# Altium PCB PCB1.PcbDoc
Units mil, origin at the board's own origin, x right, y up, seen from the top; angles counter-clockwise.
Board outline 4265 x 1410 mil, 2 copper layers (Top Layer, Bottom Layer); 24 components, 19 nets, 98 pads, 691 vias.
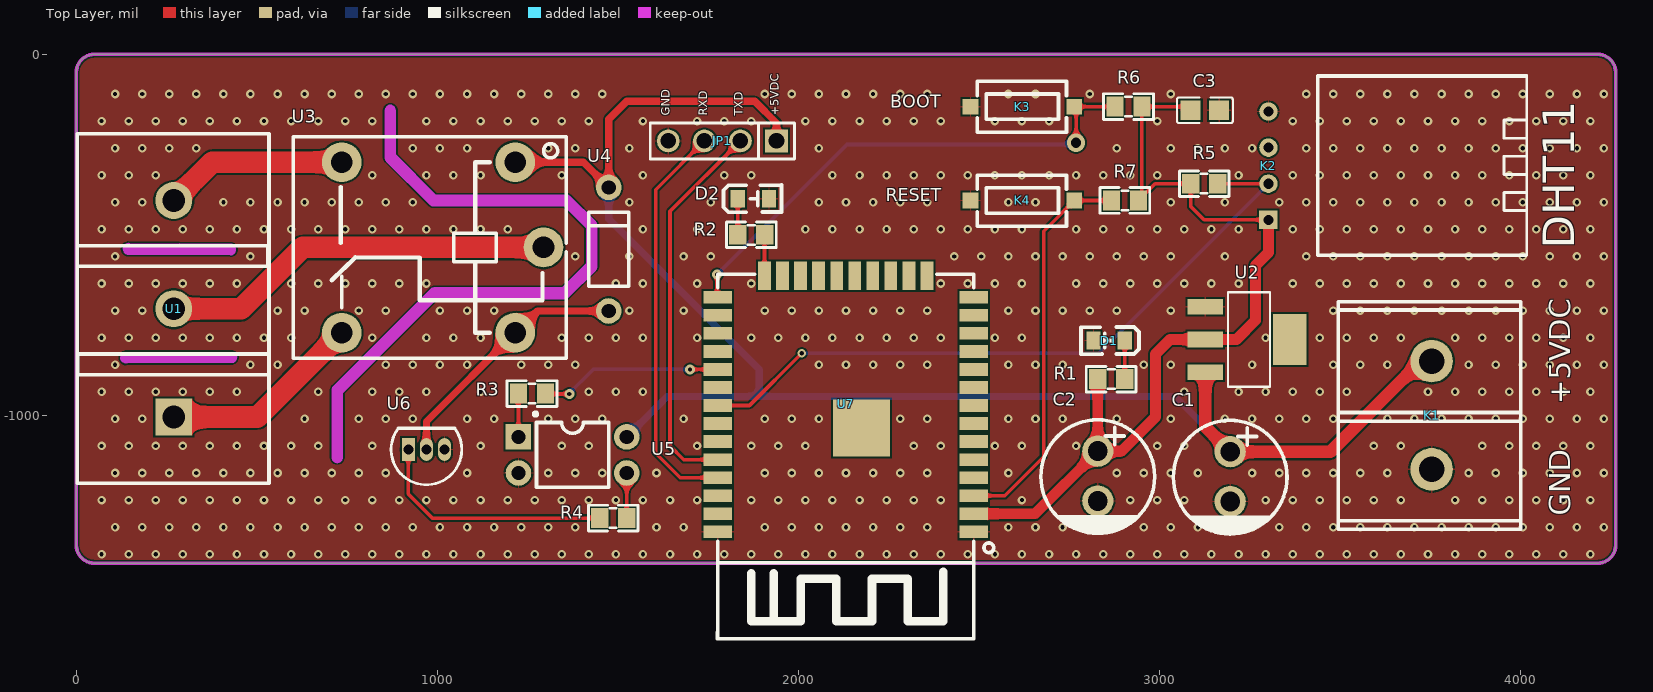
[diagram p0: Top Layer view]
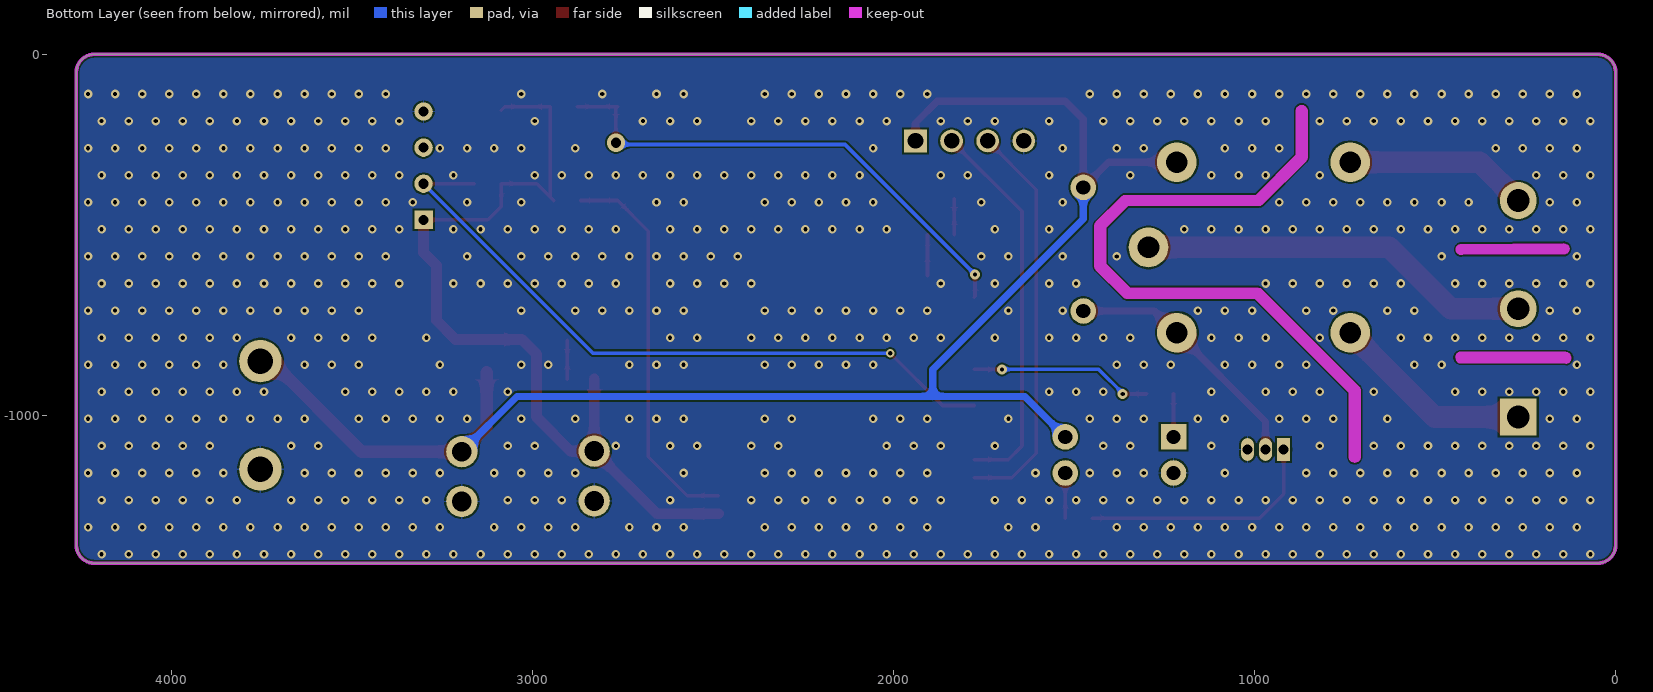
[diagram p1: Bottom Layer view, seen from below]
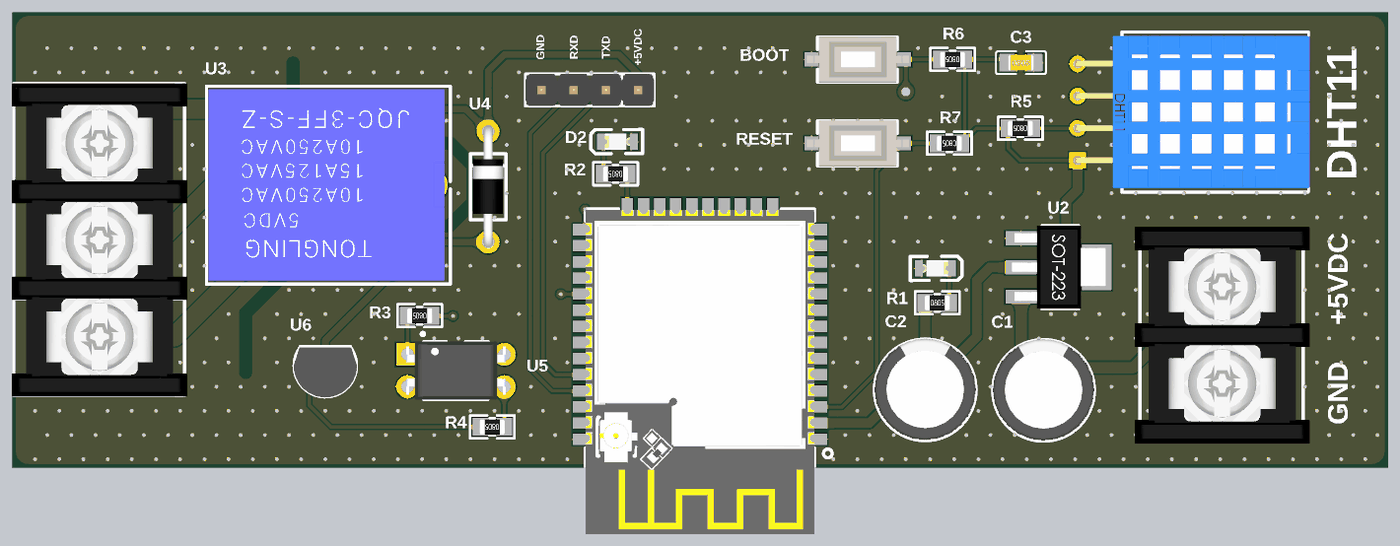
[diagram p2: 3D render of the assembled board from above, using the file's embedded part models]

## Layer stack, top to bottom
Top Solder: solder mask 0.4, Solder Resist, Dk 3.5
Top Layer: signal copper 1.4
Dielectric 1: dielectric 12.6, FR-4, Dk 4.8
Bottom Layer: signal copper 1.4
Bottom Solder: solder mask 0.4, Solder Resist, Dk 3.5

## Board outline
0,-1360 ccw(c50,-1360) 50,-1410 4215,-1410 ccw(c4215,-1360) 4265,-1360 4265,-50 ccw(c4215,-50) 4215,0 50,0 ccw(c50,-50) 0,-50
cut-out: 738.01,-1116 738.01,-937.22 998.22,-677.01 1353,-677.01 ccw(c1353,-662) 1363.63,-672.6 1363.62,-672.62 1438.62,-597.62 1438.6,-597.63 ccw(c1428,-587) 1443.01,-587 1443.01,-475 ccw(c1428,-475) 1438.6,-464.37 1438.62,-464.38 1368.62,-394.38 1368.63,-394.4 ccw(c1358,-405) 1358,-389.99 996.22,-389.99 885.01,-278.78 885.01,-156 ccw(c870,-156) 854.99,-156 854.99,-285 ccw(c870,-285) 859.4,-295.63 859.38,-295.62 979.38,-415.62 979.37,-415.6 ccw(c990,-405) 990,-420.01 1351.78,-420.01 1412.99,-481.22 1412.99,-580.78 1346.78,-646.99 992,-646.99 ccw(c992,-662) 981.37,-651.4 981.38,-651.38 712.38,-920.38 712.4,-920.37 ccw(c723,-931) 707.99,-931 707.99,-1116 ccw(c723,-1116)
cut-out: 143.89,-554.01 426.89,-556.01 ccw(c427,-541) 442.01,-541 ccw(c427,-541) 427.11,-525.99 144.11,-523.99 ccw(c144,-539)
cut-out: 138.05,-856.01 cw(c138,-841) 137.95,-825.99 428.95,-824.99 cw(c429,-840) 444.01,-840 cw(c429,-840) 429.05,-855.01

## Design rules (kind name [scope] priority, off if disabled: settings)
BoardOutlineClearance [All] p1: gap=0 ignorepadtopadclearanceinfootprint=FALSE
Clearance [All] p1: gap=5 ignorepadtopadclearanceinfootprint=FALSE except(9.84: Arc-Hole Track-Hole SMDPad-Hole THPad-Hole Via-Hole Fill-Hole Poly-Hole Region-Hole Text-Hole)
ComponentClearance [All] p1: gap=5 collisioncheckmode=3 verticalgap=5 showdistances=TRUE
DiffPairsRouting [All] p1: maxlimit=10 minlimit=5 mostfreqgap=5 toplayer_minwidth=5 toplayer_maxwidth=1000 toplayer_prefwidth=5 bottomlayer_minwidth=5 bottomlayer_maxwidth=1000 bottomlayer_prefwidth=5 maxuncoupledlength=500
Height [All] p1: minheight=0 maxheight=71497.94 prefheight=500
HoleSize [All] p1: absolutevalues=TRUE maxlimit=248.03 minlimit=11.81 maxpercent=80.000 minpercent=20.000
HoleToHoleClearance [All] p1: gap=9.84 allowstackedmicrovias=FALSE
MinimumAnnularRing [All] p1: minimumring=3
MinimumSolderMaskSliver [All] p1: minsoldermaskwidth=0
PlaneClearance [All] p1: clearance=5
PlaneConnect PlaneConnectPowerPads [InPadClass('PowerPads')] p1: planeconnectstyle=Direct reliefexpansion=20 reliefentries=4 reliefconductorwidth=10 reliefairgap=10
PlaneConnect [All] p2: pad.planeconnectstyle=Relief pad.reliefexpansion=11.81 pad.reliefentries=4 pad.reliefconductorwidth=5 pad.reliefairgap=5 via.planeconnectstyle=Direct via.reliefexpansion=11.81 via.reliefentries=4 via.reliefconductorwidth=5 via.reliefairgap=5
PolygonConnect PolygonConnectPowerPads [All vs (InPadClass('PowerPads'))] p1: connectstyle=Direct reliefconductorwidth=10 reliefentries=4 polygonreliefangle="90 Angle" airgapwidth=10
PolygonConnect [All] p2: thpad.connectstyle=Relief thpad.reliefconductorwidth=5 thpad.reliefentries=4 thpad.polygonreliefangle="90 Angle" thpad.airgapwidth=5 smdpad.connectstyle=Relief smdpad.reliefconductorwidth=5 smdpad.reliefentries=4 smdpad.polygonreliefangle="90 Angle" smdpad.airgapwidth=5 via.connectstyle=Direct via.reliefconductorwidth=5 via.reliefentries=4 via.polygonreliefangle="90 Angle" via.airgapwidth=5
RoutingVias [All] p1: holewidth=11.81 width=23.62 viastyle="Through Hole" minholewidth=11.81 minwidth=23.62 maxholewidth=23.62 maxwidth=259.84
SilkToSilkClearance [All] p1: silktosilkclearance=0
SilkToSolderMaskClearance [IsPad] p1: minsilkscreentomaskgap=0 clearancetoexposedcopper=TRUE
SolderMaskExpansion [All] p1: expansion=2.95 istentingtop=FALSE
Width [All] p1: maxlimit=1000 minlimit=5 preferedwidth=5 minimp=50.000000 maximp=50.000000 favimp=50.000000
20 further rules are at their usual default settings.

## Components (designator, comment, footprint, x,y, rotation, side; value= is the part's Value field where it differs from the comment)
C1 "100uF" C_TH_8x11.5 3196.97,-1170 r270 top
C2 "100uF" C_TH_8x11.5 2830,-1168.48 r270 top
C3 "100nF" C0805 3126.97,-155 r0 top
D1 "RED" LED0805 2861.5,-793 r180 top
D2 "RED" LED0805 1875.91,-400 r0 top
JP1 "JP 1x4 2.54" "JP 1X4 DT" 1940,-240 r180 top
K1 "DBT10-7.62-2P-GN-P" DBT10-7.62-2P-GN-P 3755,-1000 r270 top
K2 "DHT11" DHT11 3302.85,-308.54 r90 top
K3 "HX 3x6x2.5A-2.5N" "HX 3x6x2.5A-2.5N" 2621.3,-145 r180 top
K4 "HX 3x6x2.5A-2.5N" "HX 3x6x2.5A-2.5N" 2621.3,-405 r180 top
R1 "1kΩ" R0805 2867.4,-900 r0 top
R2 "1kΩ" R0805 1870,-500 r180 top
R3 "1kΩ" R0805 1262.4,-940 r180 top
R4 "1kΩ" R0805 1487.6,-1285 r180 top
R5 "1kΩ" R0805 3125,-358.54 r180 top
R6 "1kΩ" R0805 2915,-145 r180 top
R7 "1kΩ" R0805 2905,-405 r180 top
U1 "DBT50G-7.62-3P-BK-P" DBT50G-7.62-3P-BK-P 270,-705 r90 top
U2 "LM1117S-3.3" AMS1117-3.3 3245,-790 r180 top
U3 "SRD-05VDC-SL-C" SRD-05VDC-SL-C 1015,-535 r180 top
U4 "1N4007G" 1N4007G 1475,-540 r270 top
U5 "PC817X3NSZWC" PC817X3NSZWC 1375,-1110 r270 top
U6 "2SC2383-Y" 2SC2383-Y 970,-1095 r180 top
U7 "ESP32-S32Mb" ESP32-S32Mb 2131.69,-968.51 r180 top

## Footprints (in the part's own frame and the unit in brackets; to place one, negate y for a bottom-side part, rotate by r counter-clockwise, add the part's x,y. Pads: shape width x height; smd on the part's side, far side on the other; paste and mask are expansions set on the pad)
1N4007G [mm] "30A 1kV 930mV@1A 1A DO-41 Single Diodes RoHS"
  round 1.8 hole 1 paste-2539.97 mask+0.051: 1(-4.35,0) 2(4.35,0)
  silkscreen extent -2.6,-1.4 2.6,1.4, body extent -4.82,-1.2 4.77,1.2, height 2.34
2SC2383-Y [mm] "900mW 160V 1A NPN TO-92LM Single Bipolar Transistors RoHS"
  rect 0.9x1.6 hole 0.7 paste-2539.97 mask+0.051: 1(1.27,0)
  oval 0.9x1.6 hole 0.7 paste-2539.97 mask+0.051: 2(0,0) 3(-1.27,0)
  silkscreen extent -2.48,-1.5 2.48,2.48, body extent -2.79,-1.45 2.79,2.5, height 8
AMS1117-3.3 [mm]
  rect 2.5x1.1 smd paste+0 mask+0.051: 1(2.97,-2.3) 2(2.97,0) 3(2.97,2.3)
  rect 2.34x3.6 smd paste+0 mask+0.051: 4(-2.97,0)
  silkscreen extent -1.57,-3.33 1.37,3.33, body extent -3.66,-3.28 3.71,3.22, height 1.82
C0805 [mm]
  rect 1.41x1.35 smd paste-100 mask+0.051: 1(-1,0) 2(1,0)
  silkscreen extent -1.96,-0.9 1.96,0.9, body extent -1,-0.63 1,0.63, height 0.6
C_TH_8x11.5 [mm]
  round 2.2 hole 1.4 paste-2539.97 mask+0.051: 1(-1.75,0) 2(1.75,0)
  silkscreen extent -3.96,-4 4.04,4, body extent -4,-3.99 4,3.99, height 11.5
DBT10-7.62-2P-GN-P [mm] "1x2P Side Mount 2-Side 7.62mm 1 2 24A -40?~+105? Green 14~22 Straight Pin Through Hole,P=7.62mm Barrier Blocks RoHS"
  round 3 hole 1.8 paste-2539.97 mask+0.051: 1(-3.81,0) 2(3.81,0)
  silkscreen extent -7.97,-6.58 8.03,6.27, body extent -8.54,-7 8.54,6.8, height 14.8
DBT50G-7.62-3P-BK-P [mm] "1x3P Side Mount With Cover Plate 7.62mm 1 3 -40?~+105? 20A Black 12~22 Straight Pin Through Hole,P=7.62mm Barrier Blocks RoHS"
  rect 2.6x2.6 hole 1.6 paste-2539.97 mask+0.051: 1(-7.62,0)
  round 2.6 hole 1.6 paste-2539.97 mask+0.051: 2(0,0) 3(7.62,0)
  silkscreen extent -12.27,-6.71 12.32,6.78, body extent -12.35,-6.9 12.36,6.9, height 14.8
DHT11 [mil] "±5%RH -20?~+60? 5%RH~95%RH SIP-4 Humidity, Moisture Sensors RoHS"
  rect 51x51 hole 28 paste-99999 mask+2: 1(-150,0)
  round 51 hole 28 paste-99999 mask+2: 2(-50,0) 3(50,0) 4(150,0)
  silkscreen extent -248,-716 249,-137, body extent -235,-719 237,9, height 219
ESP32-S32Mb [mm] "2.4GHz ESP32 Chip On-board PCB Antenna -90dBm RF Transceiver Modules and Modems RoHS"
  rect 2x0.9 smd paste+0 mask+0.05: 1(-9,9.005) 2(-9,7.735) 3(-9,6.465) 4(-9,5.195) 5(-9,3.925) 6(-9,2.655) 7(-9,1.385) 8(-9,0.115) 9(-9,-1.155) 10(-9,-2.425) 11(-9,-3.695) 12(-9,-4.965) 13(-9,-6.235) 14(-9,-7.505) 25(9,-7.505) 26(9,-6.235) 27(9,-4.965) 28(9,-3.695) 29(9,-2.425) 30(9,-1.155) 31(9,0.115) 32(9,1.385) 33(9,2.655) 34(9,3.925) 35(9,5.195) 36(9,6.465) 37(9,7.735) 38(9,9.005)
  rect 0.9x2 smd paste+0 mask+0.05: 15(-5.715,-9.005) 16(-4.445,-9.005) 17(-3.175,-9.005) 18(-1.905,-9.005) 19(-0.635,-9.005) 20(0.635,-9.005) 21(1.905,-9.005) 22(3.175,-9.005) 23(4.445,-9.005) 24(5.715,-9.005)
  rect 4x4 smd paste+0 mask+0.05: 39(-1.1,1.689)
  silkscreen extent -10.41,-9.13 9.02,16.54, body extent -9,-9.07 9,16.53, height 3.2
"HX 3x6x2.5A-2.5N" [mm] "Without Bracket 6mm 12V 3.6mm Square Button No SPST 50mA SMD,6x3mm Tactile Switches RoHS"
  rect 1.1x1.1 smd paste+0 mask+0.051: 1(-3.65,0) 2(3.65,0)
  silkscreen extent -3.1,-1.78 3.18,1.8, body extent -4.03,-1.83 4.03,1.83, height 2.51
"JP 1X4 DT" [mm] "4 pins, 1 row, straight, gold plating"
  rect 1.6x1.6 hole 1.1: 1(0,0)
  round 1.6 hole 1.1: 2(2.54,0) 3(5.08,0) 4(7.62,0)
  silkscreen extent -1.27,-1.27 8.89,1.27, body extent -1.27,-1.27 8.89,1.27, height 8.54
LED0805 [mm]
  rect 1x1.25 smd paste+0 mask+0.051: 1(-1.1,0) 2(1.1,0)
  silkscreen extent -2.1,-0.95 1.98,0.96, body extent -1,-0.63 1,0.63, height 0.7
PC817X3NSZWC [mm] "50mA 100mV@20mA,1mA 80V 6V DC DIP-4 Transistor, Photovoltaic Output Optoisolators RoHS"
  rect 1.8x1.8 hole 1 paste-2539.97 mask+0.051: 1(-1.27,-3.81)
  round 1.8 hole 1 paste-2539.97 mask+0.051: 2(1.27,-3.81) 3(1.27,3.81) 4(-1.27,3.81)
  silkscreen extent -3,-2.73 2.29,2.54, body extent -2.3,-3.94 2.3,3.94, height 4.55
R0805 [mm]
  rect 1.2x1.4 smd: 1(-0.95,0) 2(0.95,0)
  silkscreen extent -1.75,-0.9 1.75,0.9, body extent -1,-0.6 1,0.6, height 0.4
SRD-05VDC-SL-C [mil] "250V@AC 5V 15A Through Hole,19.2x15.6mm Power Relays RoHS"
  round 110 hole 60 paste-99999 mask+2: 1(-200.79,-236.22) 2(279.53,-236.2) 3(279.53,236.2) 4(-200.79,236.22) 5(-279.53,0)
  silkscreen extent -342,-307 413,307, body extent -325,-298 407,296, height 593

## Part data
C1 C2: library part C_100uF_8x11.5_TH, "3.5mm 100uF 50V ±20% Through Hole,D8xL11.5mm Aluminum Electrolytic Capacitors RoHS", LCSC Part #=C88728, Manufacturer=Rubycon, Mfr. Part #=50YXF100MEFC8X11.5, Package="Through Hole,D5xL11mm", Tolerance=±20%, Voltage Rating=50V, Capacitance=100uF, Key Attributes="CAP ALUM 100uF ±20% 50V TH", Link=https://www.lcsc.com/product-detail/C88728.html?s_z=n_capital%2520100u%2520hole, Pin Spacing=2mm
C3: library part C0805_100nF_±1%, "50V 10pF NP0 ±1% 0402 Multilayer Ceramic Capacitors MLCC - SMD/SMT ROHS", LCSC Part #=C513681, Manufacturer=YAGEO, Mfr. Part #=CC0402FRNPO9BN100, Package=0805, Tolerance=±1%, Voltage Rating=50V, Capacitance=100nF, Link=https://www.lcsc.com/product-detail/C513681.html?s_z=n_capital%2520yageo%252010pF%25200402
D1 D2: library part D0805_RED, "25mcd~40mcd Water Clear -40℃~+85℃ 624nm Red 120° 60mW 0402 LED Indication - Discrete ROHS", LCSC Part #=C965793, Manufacturer=XINGLIGHT, Mfr. Part #=XL-1005UGC, Package=0805, Power(Watts)=60mW, Voltage - Forward(Vf)=3V, Illumination Color=RED, Link=https://www.lcsc.com/product-detail/C136765.html?s_z=n_LED%25200402%2520RED
JP1: library part "JP 1x4 2.54 Cai Thang", "Cắm", Chung_Loai=Cắm, Don_Vi=Con, Ma_Hang=MH004006, Ten_Linh_Kien="Jump Đơn Cái 2.54MM 1x20P Thẳng"
K1: "1x2P Side Mount 2-Side 7.62mm 1 2 24A -40℃~+105℃ Green 14~22 Straight Pin Through Hole,P=7.62mm Barrier Blocks RoHS", LCSC Part #=C395930, Manufacturer=DORABO, Package="Through Hole,P=7.62mm", Key Attributes="TERM BLK BARRIER 2CIRCUIT 7.62mm", Link=https://www.lcsc.com/product-detail/C395930.html?s_z=n_BARRIER%2520STRIP, Mfr. Part #=DBT10-7.62-2P-GN-P
K2: "±5%RH -20℃~+60℃ 5%RH~95%RH SIP-4 Humidity, Moisture Sensors RoHS", LCSC Part #=C117051, Manufacturer=Aosong, Package=SIP-4, Link=https://www.lcsc.com/product-detail/C117051.html?s_z=n_dht11, Mfr. Part #=DHT11
K3 K4: "Without Bracket 6mm 12V 3.6mm Square Button No SPST 50mA SMD,6x3mm Tactile Switches RoHS", LCSC Part #=C36498960, Manufacturer=hanxia, Package=SMD,6x3mm, Key Attributes="SWITCH TACTILE SPST 250gf SMD", Link=https://www.lcsc.com/product-detail/C36498960.html?s_z=n_button, Mfr. Part #="HX 3x6x2.5A-2.5N"
R1 R2 R3 R4 R5 R6 R7: library part R0805_1kΩ_±1%, "62.5mW Thick Film Resistor 50V ±1% ±200ppm/℃ 10Ω 0402 Chip Resistor - Surface Mount ROHS", LCSC Part #=C138066, Manufacturer=YAGEO, Mfr. Part #=RC0805FR-0710RL, Package=0805, Tolerance=±1%, Link=https://www.lcsc.com/product-detail/C138066.html?s_z=n_resistor%25200402%252010R, Resistance=1kΩ
U1: "1x3P Side Mount With Cover Plate 7.62mm 1 3 -40℃~+105℃ 20A Black 12~22 Straight Pin Through Hole,P=7.62mm Barrier Blocks RoHS", LCSC Part #=C496128, Manufacturer=DORABO, Package="Through Hole,P=7.62mm", Key Attributes="TERM BLK BARRIER 3CIRCUIT 7.62mm", Link=https://www.lcsc.com/product-detail/C496128.html?s_z=n_Barrier%2520blocks, Mfr. Part #=DBT50G-7.62-3P-BK-P
U2: "75dB@(120Hz) 1A Fixed 3.3V Positive 12V SOT-223-3 Voltage Regulators - Linear, Low Drop Out (LDO) Regulators ROHS", LCSC Part #=C126027, Manufacturer=HTC, Output Current=1A, Package=SOT-223-3, Voltage - Supply=12V, Link=https://www.lcsc.com/product-detail/C126027.html?s_z=n_lm1117-33, Mfr. Part #=LM1117S-3.3, Noise=100uV
U3: "250V@AC 5V 15A Through Hole,19.2x15.6mm Power Relays RoHS", LCSC Part #=C35449, Manufacturer="Songle Relay", Package="Through Hole,19.2x15.6mm", Key Attributes="Single group transfer type relay", Link=https://www.lcsc.com/product-detail/C35449.html?s_z=n_relay, Mfr. Part #=SRD-05VDC-SL-C
U4: "30A 1kV 930mV@1A 1A DO-41 Single Diodes RoHS", LCSC Part #=C232439, Manufacturer=onsemi, Package=DO-41, Key Attributes="DIODE STANDARD 1kV 1A DO-41", Link=https://www.lcsc.com/product-detail/C232439.html?s_z=n_1N4007, Mfr. Part #=1N4007G
U5: "50mA 100mV@20mA,1mA 80V 6V DC DIP-4 Transistor, Photovoltaic Output Optoisolators RoHS", LCSC Part #=C39832427, Manufacturer=SHARP, Package=DIP-4, Key Attributes="OPTOISOLATOR 5kV 1CH TRANS DIP-4", Link=https://www.lcsc.com/product-detail/C39832427.html?s_z=n_pc817, Mfr. Part #=PC817X3NSZWC
U6: "900mW 160V 1A NPN TO-92LM Single Bipolar Transistors RoHS", LCSC Part #=C2844058, Manufacturer="BLUE ROCKET", Package=TO-92LM, Key Attributes="TRANS NPN 160V 1A TO-92LM", Link=https://www.lcsc.com/product-detail/C2844058.html?s_z=n_c2383, Mfr. Part #=2SC2383-Y
U7: "2.4GHz ESP32 Chip On-board PCB Antenna -90dBm RF Transceiver Modules and Modems RoHS", LCSC Part #=C2764096, Manufacturer=Ai-Thinker, Package=SMD, Key Attributes="ESP32-S Wi-Fi + BT SoC Module", Link=https://www.lcsc.com/product-detail/C2764096.html?s_z=n_esp32, Mfr. Part #=ESP32-S32Mb

## Via types
v1: diameter 23.62, hole 11.81, Top Layer to Bottom Layer, tented both sides, 687 vias
v2: diameter 27.56, hole 11.81, Top Layer to Bottom Layer, tented both sides, 3 vias
v3: diameter 50, hole 28, Top Layer to Bottom Layer, tented both sides, 1 vias

## Nets (pads, with @x,y where several pads share a name; then routed paths per layer and width w, separated by ;. In a path a pad name is that pad's centre, name@x,y a point inside that pad or via, vN(x,y) a via of type N, cw(c..) or ccw(c..) an arc to the next point about the centre after c; other vN are vias at no path point)
+3.3V: C2.1 C3.1 K2.1 R1.1 R5.2 R6.1 R7.1 U2.2 U7.2 | length 2445.8
  Top Layer w10: R7.1 R7.1@2952.4,-395 ; C3.1 3077.6,-145 R6.1 R7.1@2952.4,-395 ; K2.1 3124.54,-458.54 3087.6,-421.6 R5.2 2988.86,-358.54 R7.1@2952.4,-395
  Top Layer w30: U7.2 2656.54,-1273.04 C2.1 ; R1.1 C2.1 ; K2.1 3302.85,-549.15 3267,-585 3267,-737 3214,-790 U2.2 3030,-790 2990,-830 2990,-1005 2895.42,-1099.58 C2.1
+5V: C1.1 JP1.1 K1.1 U2.3 U3.1 U4.1 U5.4 | length 4482.4
  Top Layer w20: U3.1 1405.04,-298.78 U4.1 1475,-180 1525,-130 1880,-130 1940,-190 JP1.1
  Top Layer w35: U2.3 3128.07,-1032.2 C1.1 3474.65,-1101.1 3725.75,-850 K1.1
  Bottom Layer w20: U4.1 1475,-456 1892,-873 1892,-948 ; U5.4 1637,-948 1892,-948 ; C1.1 3043.87,-948 1892,-948
DATA_DHT11: K2.2 R5.1 U7.31 | length 1920.5
  Top Layer w10: U7.31 1864.97,-973.04 v1(2010,-828) ; R5.1 K2.2
  Bottom Layer w10: v1(2010,-828) 2833.39,-828 K2.2
EN: K4.1 R7.2 U7.3 | length 1086.5
  Top Layer w10: U7.3 2571.97,-1223.04 2680,-1115 2680,-490 K4.1 R7.2
GND: C1.2 C2.2 C3.2 D1.2 D2.2 JP1.4 K1.2 K2.4 K3.2 K4.2 U2.1 U5.2 U6.3 U7.1 U7.38
  other v1: 70,-1385 145,-1385 220,-1385 295,-1385 370,-1385 445,-1385 520,-1385 595,-1385 670,-1385 745,-1385 820,-1385 895,-1385 970,-1385 1045,-1385 1120,-1385 1195,-1385 1270,-1385 1345,-1385 1420,-1385 1495,-1385 1570,-1385 1645,-1385 1720,-1385 1795,-1385 1870,-1385 1945,-1385 2020,-1385 2095,-1385 2170,-1385 2245,-1385 2320,-1385 2395,-1385 2470,-1385 2545,-1385 2620,-1385 2695,-1385 2770,-1385 2845,-1385 2920,-1385 2995,-1385 3070,-1385 3145,-1385 3220,-1385 3295,-1385 3370,-1385 3445,-1385 3520,-1385 3595,-1385 3670,-1385 3745,-1385 3820,-1385 3895,-1385 3970,-1385 4045,-1385 4120,-1385 4195,-1385 107.5,-1310 182.5,-1310 257.5,-1310 332.5,-1310 407.5,-1310 482.5,-1310 557.5,-1310 632.5,-1310 707.5,-1310 782.5,-1310 857.5,-1310 932.5,-1310 1007.5,-1310 1082.5,-1310 1157.5,-1310 1232.5,-1310 1307.5,-1310 1382.5,-1310 1607.5,-1310 1682.5,-1310 1907.5,-1310 1982.5,-1310 2057.5,-1310 2132.5,-1310 2207.5,-1310 2282.5,-1310 2357.5,-1310 2582.5,-1310 2657.5,-1310 2732.5,-1310 2882.5,-1310 2957.5,-1310 3032.5,-1310 3107.5,-1310 3257.5,-1310 3332.5,-1310 3407.5,-1310 3482.5,-1310 3557.5,-1310 3632.5,-1310 3707.5,-1310 3782.5,-1310 3857.5,-1310 3932.5,-1310 4007.5,-1310 4082.5,-1310 4157.5,-1310 4232.5,-1310 70,-1235 145,-1235 220,-1235 295,-1235 370,-1235 445,-1235 520,-1235 595,-1235 670,-1235 745,-1235 820,-1235 895,-1235 970,-1235 1045,-1235 1120,-1235 1195,-1235 1270,-1235 1345,-1235 1420,-1235 1495,-1235 1570,-1235 1645,-1235 1720,-1235 1870,-1235 1945,-1235 2020,-1235 2095,-1235 2170,-1235 2245,-1235 2320,-1235 2395,-1235 2620,-1235 2920,-1235 2995,-1235 3070,-1235 3295,-1235 3370,-1235 3445,-1235 3520,-1235 3595,-1235 3670,-1235 3820,-1235 3895,-1235 3970,-1235 4045,-1235 4120,-1235 4195,-1235 107.5,-1160 182.5,-1160 257.5,-1160 332.5,-1160 407.5,-1160 482.5,-1160 557.5,-1160 632.5,-1160 707.5,-1160 782.5,-1160 857.5,-1160 1082.5,-1160 1307.5,-1160 1382.5,-1160 1457.5,-1160 1607.5,-1160 1907.5,-1160 1982.5,-1160 2057.5,-1160 2132.5,-1160 2207.5,-1160 2282.5,-1160 2357.5,-1160 2582.5,-1160 2882.5,-1160 2957.5,-1160 3032.5,-1160 3107.5,-1160 3257.5,-1160 3332.5,-1160 3407.5,-1160 3482.5,-1160 3557.5,-1160 3632.5,-1160 3857.5,-1160 3932.5,-1160 4007.5,-1160 4082.5,-1160 4157.5,-1160 4232.5,-1160 70,-1085 145,-1085 220,-1085 295,-1085 370,-1085 445,-1085 520,-1085 595,-1085 670,-1085 820,-1085 1120,-1085 1345,-1085 1420,-1085 1720,-1085 1870,-1085 1945,-1085 2020,-1085 2320,-1085 2395,-1085 2545,-1085 2620,-1085 2770,-1085 2995,-1085 3070,-1085 3595,-1085 3670,-1085 3895,-1085 3970,-1085 4045,-1085 4120,-1085 4195,-1085 107.5,-1010 182.5,-1010 632.5,-1010 782.5,-1010 857.5,-1010 932.5,-1010 1082.5,-1010 1157.5,-1010 1307.5,-1010 1382.5,-1010 1457.5,-1010 1682.5,-1010 1907.5,-1010 1982.5,-1010 2057.5,-1010 2282.5,-1010 2357.5,-1010 2582.5,-1010 2657.5,-1010 2732.5,-1010 2882.5,-1010 3032.5,-1010 3182.5,-1010 3257.5,-1010 3332.5,-1010 3407.5,-1010 3482.5,-1010 3632.5,-1010 3707.5,-1010 3782.5,-1010 3857.5,-1010 3932.5,-1010 4007.5,-1010 4082.5,-1010 4157.5,-1010 4232.5,-1010 70,-935 145,-935 220,-935 295,-935 370,-935 445,-935 670,-935 820,-935 895,-935 970,-935 1120,-935 1420,-935 1495,-935 1570,-935 3070,-935 3220,-935 3295,-935 3370,-935 3445,-935 3520,-935 3745,-935 3820,-935 3895,-935 3970,-935 4045,-935 4120,-935 4195,-935 107.5,-860 482.5,-860 557.5,-860 857.5,-860 932.5,-860 1007.5,-860 1082.5,-860 1232.5,-860 1307.5,-860 1382.5,-860 2057.5,-860 2132.5,-860 2207.5,-860 2282.5,-860 2357.5,-860 2582.5,-860 2657.5,-860 2732.5,-860 2957.5,-860 3032.5,-860 3257.5,-860 3482.5,-860 3557.5,-860 3632.5,-860 3857.5,-860 3932.5,-860 4007.5,-860 4082.5,-860 4157.5,-860 4232.5,-860 70,-785 145,-785 220,-785 295,-785 370,-785 445,-785 520,-785 595,-785 820,-785 970,-785 1045,-785 1120,-785 1345,-785 1420,-785 1495,-785 1570,-785 1720,-785 1870,-785 1945,-785 2020,-785 2095,-785 2170,-785 2245,-785 2320,-785 2395,-785 2545,-785 2620,-785 3295,-785 3445,-785 3520,-785 3595,-785 3670,-785 3820,-785 3895,-785 3970,-785 4045,-785 4120,-785 4195,-785 107.5,-710 182.5,-710 557.5,-710 632.5,-710 782.5,-710 857.5,-710 1007.5,-710 1082.5,-710 1157.5,-710 1532.5,-710 1682.5,-710 1907.5,-710 1982.5,-710 2057.5,-710 2132.5,-710 2207.5,-710 2282.5,-710 2357.5,-710 2582.5,-710 2657.5,-710 2732.5,-710 2807.5,-710 2882.5,-710 3032.5,-710 3482.5,-710 3557.5,-710 3632.5,-710 3707.5,-710 3782.5,-710 3857.5,-710 3932.5,-710 4007.5,-710 4082.5,-710 4157.5,-710 4232.5,-710 70,-635 145,-635 220,-635 295,-635 370,-635 445,-635 595,-635 670,-635 745,-635 820,-635 895,-635 970,-635 1495,-635 1570,-635 1720,-635 1870,-635 2395,-635 2470,-635 2545,-635 2620,-635 2770,-635 2845,-635 2920,-635 2995,-635 3070,-635 3145,-635 3220,-635 3370,-635 3445,-635 3520,-635 3595,-635 3670,-635 3745,-635 3820,-635 3895,-635 3970,-635 4045,-635 4120,-635 4195,-635 107.5,-560 482.5,-560 1382.5,-560 1532.5,-560 1682.5,-560 1757.5,-560 2432.5,-560 2507.5,-560 2582.5,-560 2657.5,-560 2732.5,-560 2807.5,-560 2882.5,-560 2957.5,-560 3032.5,-560 3182.5,-560 3407.5,-560 3482.5,-560 3557.5,-560 3632.5,-560 3707.5,-560 3782.5,-560 3857.5,-560 3932.5,-560 4007.5,-560 4082.5,-560 4157.5,-560 4232.5,-560 70,-485 145,-485 220,-485 295,-485 370,-485 445,-485 520,-485 595,-485 670,-485 745,-485 820,-485 895,-485 970,-485 1045,-485 1120,-485 1195,-485 1570,-485 1720,-485 2020,-485 2095,-485 2170,-485 2245,-485 2320,-485 2395,-485 2470,-485 2545,-485 2620,-485 2770,-485 2845,-485 2920,-485 2995,-485 3070,-485 3145,-485 3220,-485 3370,-485 3445,-485 3520,-485 3595,-485 3670,-485 3745,-485 3820,-485 3895,-485 3970,-485 4045,-485 4120,-485 4195,-485 107.5,-410 182.5,-410 407.5,-410 482.5,-410 557.5,-410 632.5,-410 707.5,-410 782.5,-410 857.5,-410 932.5,-410 1532.5,-410 1757.5,-410 2057.5,-410 2132.5,-410 2207.5,-410 2282.5,-410 2357.5,-410 2582.5,-410 2657.5,-410 3032.5,-410 3182.5,-410 3332.5,-410 3407.5,-410 3482.5,-410 3557.5,-410 3632.5,-410 3707.5,-410 3782.5,-410 3857.5,-410 3932.5,-410 4007.5,-410 4082.5,-410 4157.5,-410 4232.5,-410 70,-335 145,-335 220,-335 820,-335 970,-335 1045,-335 1120,-335 1345,-335 1570,-335 1795,-335 1870,-335 2095,-335 2170,-335 2245,-335 2320,-335 2395,-335 2470,-335 2545,-335 2620,-335 2695,-335 2770,-335 2845,-335 2920,-335 2995,-335 3220,-335 3370,-335 3445,-335 3520,-335 3595,-335 3670,-335 3745,-335 3820,-335 3895,-335 3970,-335 4045,-335 4120,-335 4195,-335 107.5,-260 182.5,-260 257.5,-260 332.5,-260 932.5,-260 1007.5,-260 1082.5,-260 1307.5,-260 1382.5,-260 1532.5,-260 2057.5,-260 2882.5,-260 3032.5,-260 3107.5,-260 3182.5,-260 3257.5,-260 3407.5,-260 3482.5,-260 3557.5,-260 3632.5,-260 3707.5,-260 3782.5,-260 3857.5,-260 3932.5,-260 4007.5,-260 4082.5,-260 4157.5,-260 4232.5,-260 70,-185 145,-185 220,-185 295,-185 370,-185 445,-185 520,-185 595,-185 670,-185 745,-185 820,-185 970,-185 1045,-185 1120,-185 1195,-185 1270,-185 1345,-185 1420,-185 1570,-185 1720,-185 1795,-185 1870,-185 2020,-185 2095,-185 2170,-185 2245,-185 2320,-185 2395,-185 2545,-185 2620,-185 2695,-185 2995,-185 3370,-185 3445,-185 3520,-185 3595,-185 3670,-185 3745,-185 3820,-185 3895,-185 3970,-185 4045,-185 4120,-185 4195,-185 107.5,-110 182.5,-110 257.5,-110 332.5,-110 407.5,-110 482.5,-110 557.5,-110 632.5,-110 707.5,-110 782.5,-110 857.5,-110 932.5,-110 1007.5,-110 1082.5,-110 1157.5,-110 1232.5,-110 1307.5,-110 1382.5,-110 1457.5,-110 1907.5,-110 1982.5,-110 2057.5,-110 2132.5,-110 2207.5,-110 2282.5,-110 2357.5,-110 2582.5,-110 2657.5,-110 2807.5,-110 3032.5,-110 3407.5,-110 3482.5,-110 3557.5,-110 3632.5,-110 3707.5,-110 3782.5,-110 3857.5,-110 3932.5,-110 4007.5,-110 4082.5,-110 4157.5,-110 4232.5,-110
IO0: K3.1 R6.2 U7.25 | length 1424.9
  Top Layer w10: v2(1775,-610) 1775,-670.67 U7.25 ; v3(2770,-245) 2770,-150 K3.1 R6.2
  Bottom Layer w10: v2(1775,-610) 2135,-250 2765,-250 v3(2770,-245)
IO2: R2.1 U7.24 | length 114.3
  Top Layer w10: U7.24 1906.69,-500.71 R2.1
IO5: R3.1 U7.29 | length 507.3
  Top Layer w10: R3.1 1300.8,-941 v2(1366,-941) ; v2(1700,-873) U7.29
  Bottom Layer w10: v2(1366,-941) 1366,-939 1432,-873 v2(1700,-873)
NetD1_1: D1.1 R1.2 | length 107
  Top Layer w10: R1.2 D1.1
NetD2_1: D2.1 R2.2 | length 100
  Top Layer w10: R2.2 D2.1
NetR3_2: R3.2 U5.1 | length 120
  Top Layer w10: U5.1 R3.2
NetR4_1: R4.1 U5.3 | length 125
  Top Layer w10: R4.1 U5.3
NetR4_2: R4.2 U6.1 | length 680.9
  Top Layer w10: U6.1 920,-1218 987,-1285 R4.2
NetU1_1: U1.1 U3.3 | length 562.3
  Top Layer w60: U1.1 501.67,-1005 U3.3
NetU1_2: U1.2 U3.5 | length 1094.9
  Top Layer w60: U1.2 457,-705 627,-535 U3.5
NetU1_3: U1.3 U3.2 | length 509.5
  Top Layer w60: U1.3 376.2,-298.8 U3.2
NetU3_4: U3.4 U4.2 U6.2 | length 723.6
  Top Layer w20: U6.2 970,-1017.01 U3.4 U3.4@1215.79,-773.59 ; U3.4@1215.79,-784.21 U3.4@1215.79,-773.59 ; U4.2 1278.12,-711.26 U3.4@1215.79,-773.59
RX: JP1.3 U7.35 | length 1121.5
  Top Layer w10: JP1.3 1605,-375 1605,-1105 1673.03,-1173.04 U7.35
TX: JP1.2 U7.34 | length 1073.9
  Top Layer w10: U7.34 1683.03,-1123.04 1645,-1085 1645,-435 JP1.2
pads on no net: K2.3 U2.4 U7.4 U7.5 U7.6 U7.7 U7.8 U7.9 U7.10 U7.11 U7.12 U7.13 U7.14 U7.15 U7.16 U7.17 U7.18 U7.19 U7.20 U7.21 U7.22 U7.23 U7.26 U7.27 U7.28 U7.30 U7.32 U7.33 U7.36 U7.37 U7.39

## Polygon pours and split planes (outlines as drawn)
GND on Top Layer "NONET_L-01_P-001" (solid, pour order 0): 0,-1360 0,-50 cw(c50,-50) 50,0 4215,0 cw(c4215,-50) 4265,-50 4265,-1360 cw(c4215,-1360) 4215,-1410 50,-1410 cw(c50,-1360)
GND on Bottom Layer "NONET_L-01_P-001" (solid, pour order 1): 0,-1360 0,-50 cw(c50,-50) 50,0 4215,0 cw(c4215,-50) 4265,-50 4265,-1360 cw(c4215,-1360) 4215,-1410 50,-1410 cw(c50,-1360)

## Keep-outs
Keep-Out Layer:
  lines w10: 0,-1360 ccw(c50,-1360) 50,-1410 1740,-1410 4215,-1410 ccw(c4215,-1360) 4265,-1360 4265,-50 ccw(c4215,-50) 4215,0 50,0 ccw(c50,-50) 0,-50 0,-1360
  lines w30: 138,-841 429,-840 ; 144,-539 427,-541 ; 723,-1116 723,-931 992,-662 1353,-662 1428,-587 1428,-475 1358,-405 990,-405 870,-285 870,-156

## Silkscreen, mask and mechanical layers (free items; w line width, h text height)
Top Overlay:
  text "BOOT" at 2255.02,-160.2 h60
  text "GND" at 1652.28,-170.25 h40 r90
  text "RXD" at 1756.28,-170.25 h40 r90
  text "TXD" at 1855.28,-170.25 h40 r90
  text "+5VDC" at 1954.28,-170.25 h40 r90
  text "RESET" at 2243.06,-420.2 h60
  text "DHT11" at 4179,-539 h150 r90
  text "+5VDC" at 4158.51,-969.25 h100 r90
  text "GND" at 4158.51,-1278 h100 r90